# Altium PCB Remie_PCB.PcbDoc (part 1 of 2)
Units mil, origin at the board's own origin, x right, y up, seen from the top; angles counter-clockwise.
Board outline 600 x 1730 mil, 4 copper layers (Top Layer, Int1 (GND), Int2 (PWR), Bottom Layer), stack 61.496 mil thick; 45 components, 27 nets, 169 pads, 72 vias.
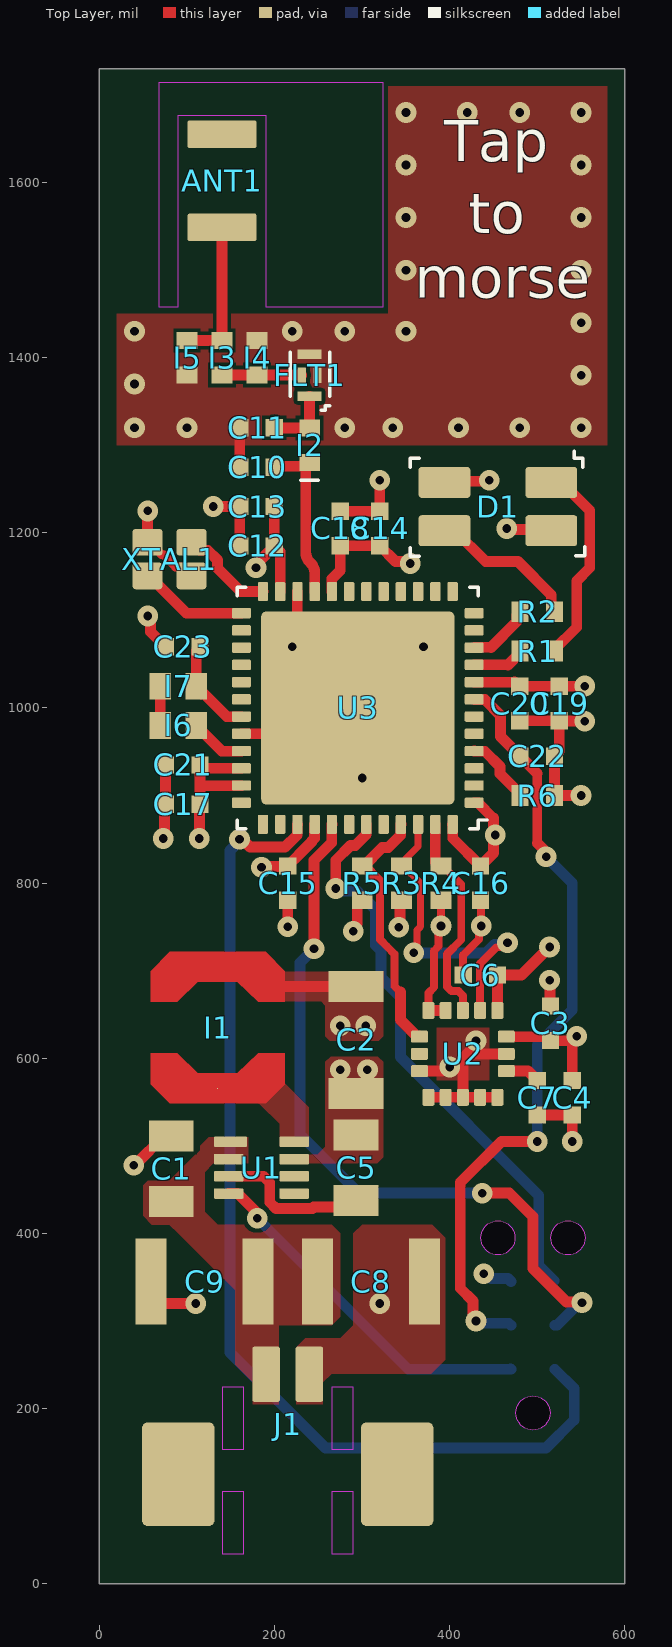
[diagram p0: Top Layer view]
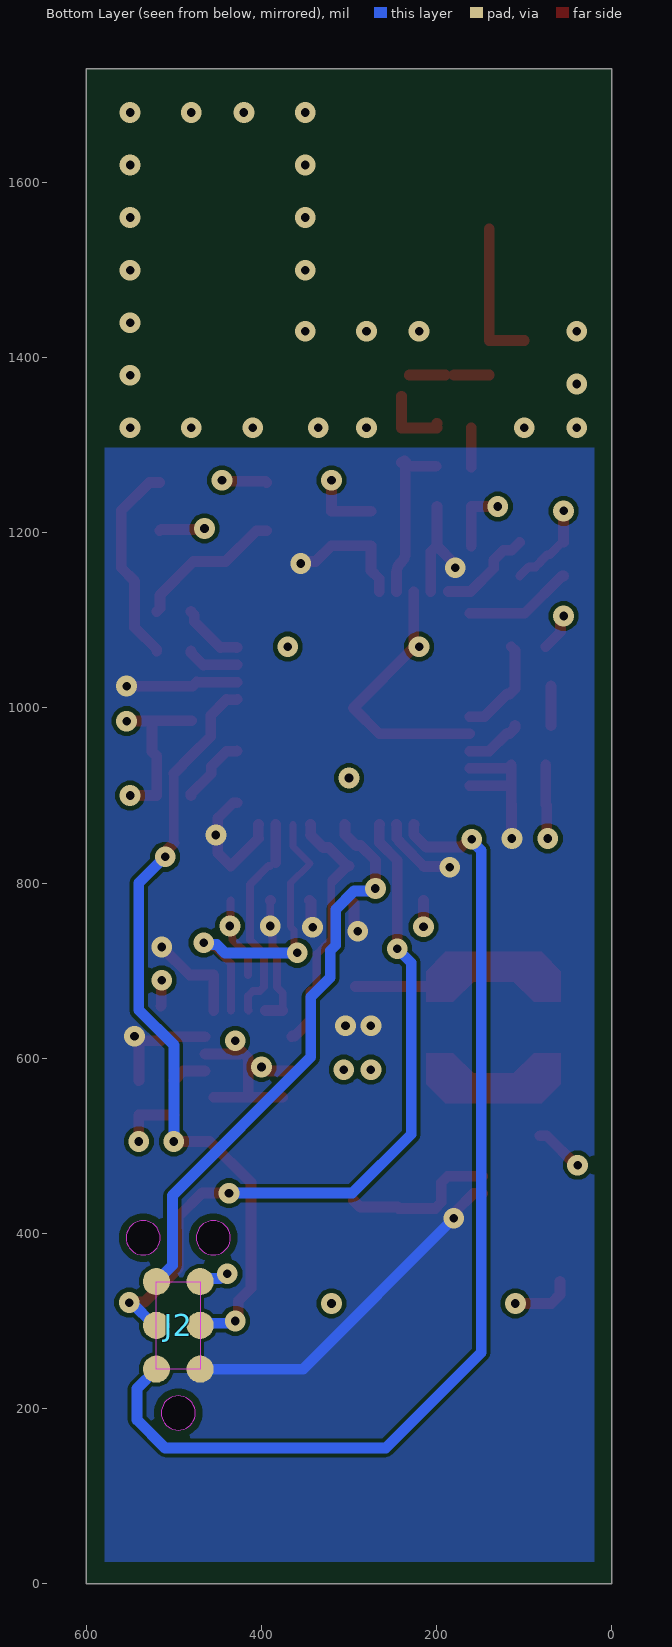
[diagram p1: Bottom Layer view, seen from below]
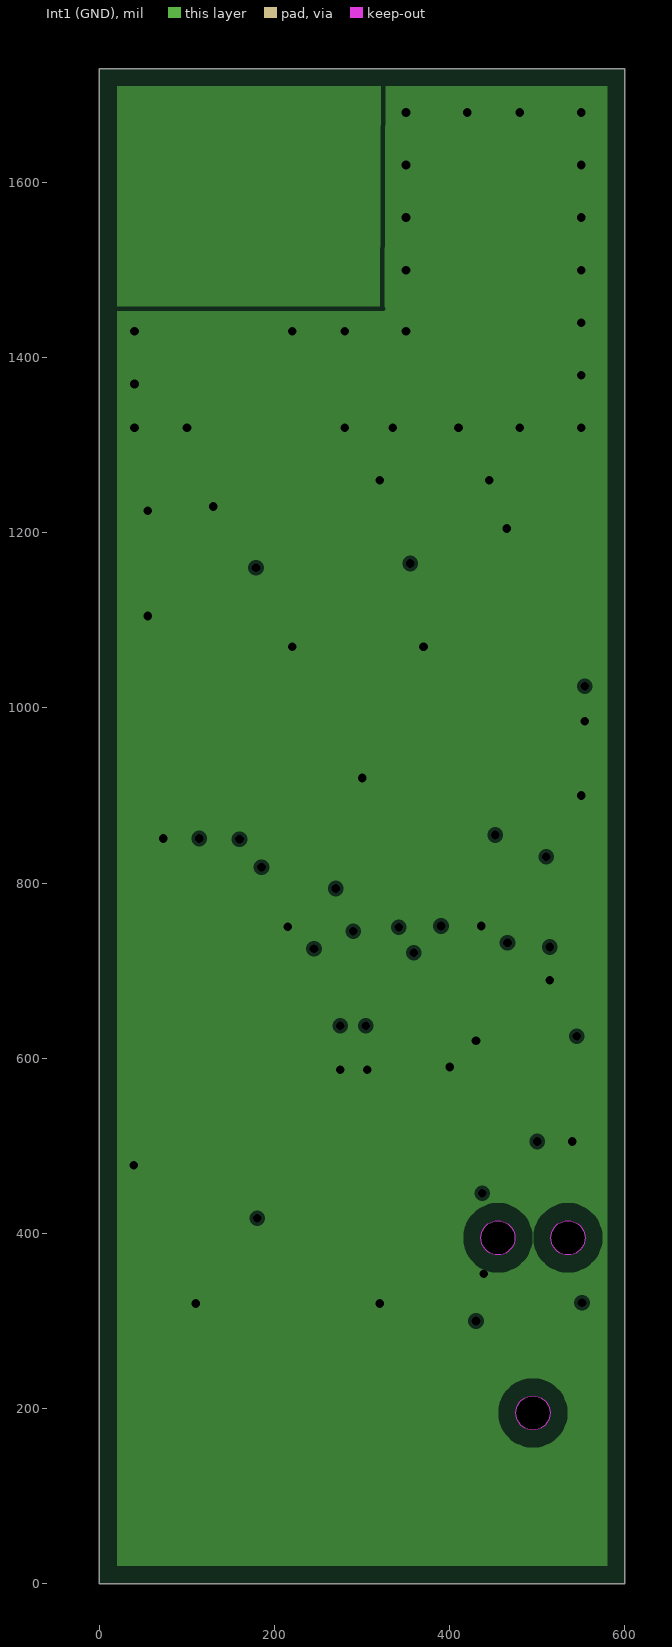
[diagram p2: Int1 (GND), clearances drawn from the general rule]
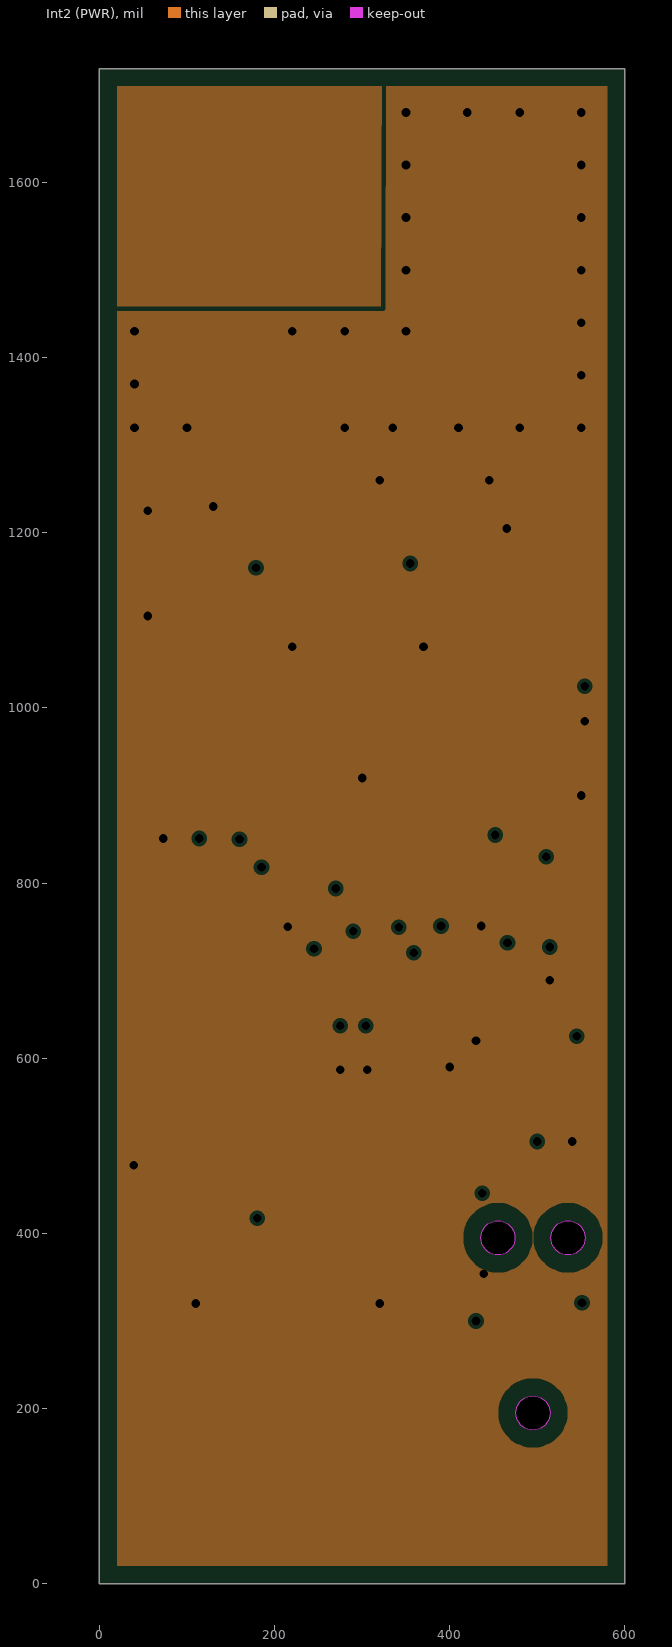
[diagram p3: Int2 (PWR), clearances drawn from the general rule]
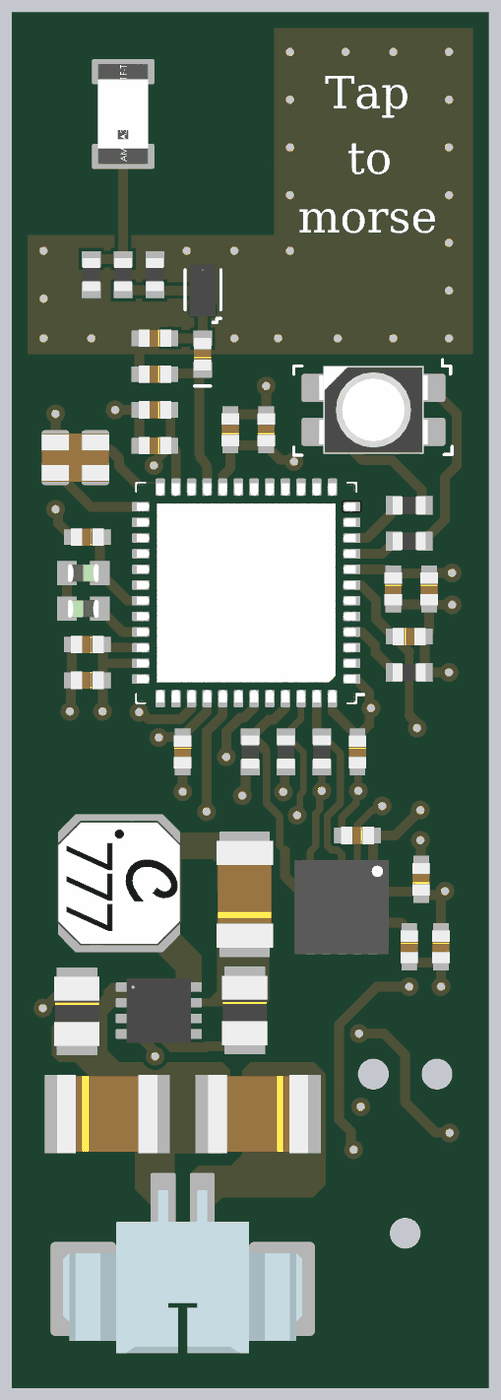
[diagram p4: 3D render of the assembled board from above, using the file's embedded part models]

## Layer stack, top to bottom
Top Solder: solder mask 1, SM-001, Dk 4
Top Layer: signal copper 1.378
Dielectric 1: prepreg 7.7165, PP-022, Dk 4.56
Int1 (GND): plane copper 1.378, net GND
Dielectric 3: core 40.5512, Core-039, Dk 4.6
Int2 (PWR): plane copper 1.378, net GND
Dielectric 5: prepreg 7.7165, PP-022, Dk 4.56
Bottom Layer: signal copper 1.378
Bottom Solder: solder mask 1, SM-001, Dk 4

## Board outline
0,0 600,0 600,1730 0,1730

## Design rules (kind name [scope] priority, off if disabled: settings)
BoardOutlineClearance [All] p1: gap=7.87 ignorepadtopadclearanceinfootprint=FALSE
Clearance [All] p1: gap=4 ignorepadtopadclearanceinfootprint=TRUE except(5: Arc-Via Track-Via SMDPad-Via THPad-Via Via-Via Via-Fill Via-Poly Via-Region Via-Text; 10: Arc-Hole Track-Hole SMDPad-Hole THPad-Hole Via-Hole Fill-Hole Poly-Hole Region-Hole Text-Hole)
ComponentClearance [All] p1: gap=4 collisioncheckmode=3 verticalgap=4 showdistances=TRUE
DiffPairsRouting [All] p1: maxlimit=4 minlimit=4 mostfreqgap=4 toplayer_minwidth=4 toplayer_maxwidth=71497.94 toplayer_prefwidth=4 bottomlayer_minwidth=4 bottomlayer_maxwidth=71497.94 bottomlayer_prefwidth=4 maxuncoupledlength=500
Height [All] p1: minheight=0 maxheight=71497.94 prefheight=500
HoleSize [All] p1: absolutevalues=TRUE maxlimit=248.03 minlimit=7.87 maxpercent=80.000 minpercent=20.000
HoleToHoleClearance [All] p1: gap=10 allowstackedmicrovias=FALSE
MinimumAnnularRing [All] p1: minimumring=6
MinimumSolderMaskSliver [All] p1: minsoldermaskwidth=4
PlaneClearance [All] p1: clearance=4
PlaneConnect PlaneConnectPowerPads [InPadClass('PowerPads')] p1: planeconnectstyle=Direct reliefexpansion=20 reliefentries=4 reliefconductorwidth=10 reliefairgap=10
PlaneConnect [All] p2: pad.planeconnectstyle=Relief pad.reliefexpansion=11.81 pad.reliefentries=4 pad.reliefconductorwidth=4 pad.reliefairgap=4 via.planeconnectstyle=Direct via.reliefexpansion=11.81 via.reliefentries=4 via.reliefconductorwidth=5 via.reliefairgap=5
PolygonConnect [All] p1: thpad.connectstyle=Relief thpad.reliefconductorwidth=4 thpad.reliefentries=4 thpad.polygonreliefangle="90 Angle" thpad.airgapwidth=4 smdpad.connectstyle=Direct smdpad.reliefconductorwidth=4 smdpad.reliefentries=4 smdpad.polygonreliefangle="90 Angle" smdpad.airgapwidth=4 via.connectstyle=Direct via.reliefconductorwidth=5 via.reliefentries=4 via.polygonreliefangle="90 Angle" via.airgapwidth=5
RoutingVias [All] p1: holewidth=7.87 width=17.72 viastyle="Through Hole" minholewidth=7.87 minwidth=17.72 maxholewidth=248.03 maxwidth=257.87
SilkToSilkClearance [All] p1: silktosilkclearance=5
SilkToSolderMaskClearance [IsPad] p1: minsilkscreentomaskgap=5 clearancetoexposedcopper=TRUE
SolderMaskExpansion [All] p1: expansion=0 istentingtop=FALSE
SupplyNets "Schematic Supply Nets_2" [InNet('VCC')] p1: voltage=0.000
SupplyNets "Schematic Supply Nets_1" [InNet('GND')] p2: voltage=0.000
SupplyNets "Schematic Supply Nets" [InNet('+3V3')] p3: voltage=0.000
UnRoutedNet [All] p1: checkbadconnections=TRUE
Width [All] p1: maxlimit=1000 minlimit=4 preferedwidth=12.3 minimp=50.000000 maximp=50.000000 favimp=50.000000
19 further rules are at their usual default settings.

## Components (designator, comment, footprint, x,y, rotation, side; value= is the part's Value field where it differs from the comment)
ANT1 "ANT AMCA31-2R450G-S1F-T3" "ABRACON AMCA31" 140,1602 r180 top
C1 "1uF 16V" C0805 82,474 r270 top value=1uF
C2 "12066C106KAT2A" C1206 293,621 r90 top
C3 "C 0.1u 0402" C0402 515,640 r270 top value=100nF
C4 "C 2.2uF 0402 10V X7R" C0402 540,555 r90 top value=2.2uF
C5 "1uF 16V" C0805 293,475 r270 top value=1uF
C6 "C 10nF 0402" C0402 435,695 r0 top value=10nF
C7 "C 470nF 0402 16V X7R" C0402 500,555 r90 top value=470nF
C8 "C1210C226K9RACTU" C1210 310,345 r180 top
C9 "C1210C226K9RACTU" C1210 120,345 r0 top
C10 "C 0.8 pF 0402 50V C0G" C0402 180,1275 r0 top value=0.8pF
C11 "C 0.3 pF 0402 50V C0G" C0402 180,1320 r0 top
C12 "C 1uF 0402" C0402 180,1185 r0 top
C13 "C 4.7uF 0402 16V" C0402 180,1230 r0 top value=4.7uF
C14 "C 4.7uF 0402 16V" C0402 320,1205 r270 top value=4.7uF
C15 "C 0.1u 0402" C0402 215,800 r90 top value=100nF
C16 "C 0.1u 0402" C0402 435,800 r90 top value=100nF
C17 "C 0.1u 0402" C0402 95,890 r0 top value=100nF
C18 "C 0.1u 0402" C0402 275,1205 r270 top value=100nF
C19 "C 1uF 0402" C0402 525,1005 r90 top
C20 "C 10nF 0402" C0402 480,1005 r90 top value=10nF
C21 "C 4.7uF 0402 16V" C0402 95,935 r0 top value=4.7uF
C22 "C 0.1u 0402 J" C0402 500,945 r180 top
C23 "C 4.7uF 0402 16V" C0402 95,1070 r0 top value=4.7uF
D1 "D BI LED WURTH 150141SV73110" "Wurth 150141SV73110" 455,1230 r180 top
FLT1 "FLT DLF162500LT-5028A1" "TDK DLF Series" 240,1380 r90 top
I1 "I 33uH LPS4018-333MRC" "COILCRAFT LPS4018" 135,635 r90 top value=33uH
I2 "I 2.7nH 0402" "I0402 POL" 240,1300 r90 top value=2.7nH
I3 "I 8.3nH 2% RF 0402" R0402 140,1400 r90 top
I4 "I 9.7nH 5% RF 0402" R0402 180,1400 r270 top
I5 "I 9.7nH 5% RF 0402" R0402 100,1400 r90 top
I6 "I 10 nH Murata" "MURATA LQG15XXX IND" 90,980 r180 top value=10nH
I7 "I 10 nH Murata" "MURATA LQG15XXX IND" 90,1025 r0 top value=10nH
J1 "J MOLEX 2P SMT CONN 53261-0271" "MOLEX 532610271" 215,239.17 r180 top
J2 "Do not place! TAG Connect for STM" TAG-CONNECT-6 495,295 r90 bottom
R1 "R 150 0402" R0402 500,1065 r0 top value=150R
R2 "R 150 0402" R0402 500,1110 r0 top value=150R
R3 "R 5.1K 0402" R0402 345,800 r270 top value=5.1kR
R4 "R 5.1K 0402" R0402 390,800 r270 top value=5.1kR
R5 "R 5.1K 0402" R0402 300,800 r270 top value=5.1kR
R6 "R 10K 0402 1%" R0402 500,900 r180 top value=10kR
U1 "U MAX15462AATA+T" 8TDFN-CU 185,475 r270 top
U2 "U IAM-20680HP" IAM-20680HP 415,605 r270 top
U3 "U STM32WB55CEU6" "STM32WB55xx VFQFPN58" 295,1000 r90 top
XTAL1 "XTAL ABM11W-32.0000MHZ-7-D1X-T3" "ABRACON ABM11W CRYSTALS" 80,1170 r180 top

## Footprints (in the part's own frame and the unit in brackets; to place one, negate y for a bottom-side part, rotate by r counter-clockwise, add the part's x,y. Pads: shape width x height; smd on the part's side, far side on the other; paste and mask are expansions set on the pad)
8TDFN-CU [mm]
  rrect15% 0.3x0.95 smd: 1(-0.75,-0.9)
  rrect15% 0.3x0.85 smd: 2(-0.25,-0.95) 3(0.25,-0.95) 4(0.75,-0.95) 5(0.75,0.95) 6(0.25,0.95) 7(-0.25,0.95) 8(-0.75,0.95)
  body extent -1.03,-1.03 1.03,1.03, height 0.81
"ABRACON ABM11W CRYSTALS" [mm]
  rrect25% 0.875x0.775 smd: 1(-0.637,-0.487) 2(0.637,-0.487) 3(0.637,0.487) 4(-0.637,0.487)
  body extent -1.07,-0.77 1.07,0.77, height 0.5
"ABRACON AMCA31" [mm]
  rrect15% 2x0.8 smd: 1(0,1.35) 2(0,-1.35)
  Top Layer keep-out region: -4.67,3.65 -4.67,-2.85 1.83,-2.85 1.83,3.65 1.822,3.658 1.27,3.658 1.27,-1.905 -1.27,-1.905 -1.27,3.65
  body extent -0.8,-1.6 0.8,1.6, height 1.2
C0402 [mm]
  rect 0.5x0.5 smd: 1(-0.5,0) 2(0.5,0)
  body extent -0.52,-0.28 0.52,0.28, height 0.56
C0805 [mm]
  rect 0.9x1.3 smd: 1(-0.95,0) 2(0.95,0)
  body extent -1.1,-0.72 1.11,0.72, height 0.94
C1206 [mm]
  rect 0.9x1.6 smd: 1(-1.55,0) 2(1.55,0)
  body extent -1.7,-0.9 1.7,0.9, height 1.27
C1210 [mm]
  rect 0.9x2.5 smd: 1(-1.55,0) 2(1.55,0)
  body extent -1.6,-1.25 1.6,1.25, height 1
"COILCRAFT LPS4018" [mil]
  round 1 smd: 1(-69.49,0) 2(69.49,0)
  Top Layer region: 29.53,-76.57 29.53,-46.06 52.36,-22.64 52.36,22.64 29.53,46.06 29.53,76.57 64.57,76.57 86.61,54.92 86.61,-54.92 64.57,-76.57
  Top Layer region: -86.61,-54.92 -64.57,-76.57 -29.53,-76.57 -29.53,-46.06 -52.36,-22.64 -52.36,22.64 -29.53,46.06 -29.53,76.57 -64.57,76.57 -86.61,54.92
  body extent -78,-78 78,78, height 71
"I0402 POL" [mm]
  rect 0.5x0.6 smd: 1(-0.5,0) 2(0.5,0)
  silkscreen extent -1.02,-0.25 -1.02,0.25, body extent -0.52,-0.28 0.52,0.28, height 0.56
IAM-20680HP [mm]
  rrect25% 0.49x0.35 smd: 1(-1.26,1) 2(-1.26,0.5) 3(-1.26,0) 4(-1.26,-0.5) 5(-1.26,-1) 9(1.26,-1) 10(1.26,-0.5) 11(1.26,0) 12(1.26,0.5) 13(1.26,1)
  rrect25% 0.35x0.49 smd: 6(-0.5,-1.26) 7(0,-1.26) 8(0.5,-1.26) 14(0.5,1.26) 15(0,1.26) 16(-0.5,1.26)
  body extent -1.5,-1.5 1.5,1.5, height 0.8
"MOLEX 532610271" [mm]
  rrect15% 0.8x1.6 smd: 1(0.625,0) 2(-0.625,0)
  rrect15% 2.1x3 smd: NC(-3.175,2.9) NC(3.175,2.9)
  Top Layer keep-out region: -1.905,3.407 -1.27,3.407 -1.27,5.207 -1.905,5.207
  Top Layer keep-out region: -1.905,0.381 -1.27,0.381 -1.27,2.181 -1.905,2.181
  Top Layer keep-out region: 1.27,0.381 1.905,0.381 1.905,2.181 1.27,2.181
  Top Layer keep-out region: 1.27,3.407 1.905,3.407 1.905,5.207 1.27,5.207
  body extent -3.83,-0.25 3.83,4.95, height 3.4
"MURATA LQG15XXX IND" [mil]
  rect 24.7x30.41 smd paste+0 mask+0: 1(-20.57,0) 2(20.57,0)
  body extent -20,-12 20,12, height 24
R0402 [mm]
  rect 0.5x0.6 smd: 1(-0.5,0) 2(0.5,0)
  body extent -0.52,-0.28 0.52,0.28, height 0.41
"STM32WB55xx VFQFPN58" [mm]
  rrect25% 0.3x0.55 smd: 1(-2.75,-3.375) 2(-2.25,-3.375) 3(-1.75,-3.375) 4(-1.25,-3.375) 5(-0.75,-3.375) 6(-0.25,-3.375) 7(0.25,-3.375) 8(0.75,-3.375) 9(1.25,-3.375) 10(1.75,-3.375) 11(2.25,-3.375) 25(2.75,3.375) 26(2.25,3.375) 27(1.75,3.375) 28(1.25,3.375) 29(0.75,3.375) 30(0.25,3.375) 31(-0.25,3.375) 32(-0.75,3.375) 33(-1.25,3.375) 34(-1.75,3.375) 35(-2.25,3.375) 36(-2.75,3.375)
  rrect25% 0.3x0.55 smd mask+0.051: 12(2.75,-3.375)
  rrect25% 0.55x0.3 smd: 13(3.375,-2.75) 14(3.375,-2.25) 15(3.375,-1.75) 16(3.375,-1.25) 17(3.375,-0.75) 18(3.375,-0.25) 19(3.375,0.25) 20(3.375,0.75) 21(3.375,1.25) 22(3.375,1.75) 23(3.375,2.25) 24(3.375,2.75) 37(-3.375,2.75) 38(-3.375,2.25) 39(-3.375,1.75) 40(-3.375,1.25) 41(-3.375,0.75) 42(-3.375,0.25) 43(-3.375,-0.25) 44(-3.375,-0.75) 45(-3.375,-1.25) 46(-3.375,-1.75) 47(-3.375,-2.25) 48(-3.375,-2.75)
  rrect5% 5.6x5.6 smd paste-2539.97: 49(0,0)
  silkscreen extent -3.5,-3.75 3.5,3.5, body extent -3.5,-3.5 3.5,3.5, height 0.6
TAG-CONNECT-6 [mil]
  round 30.98 smd paste-39.37: 1(-50,-25) 2(-50,25) 3(0,-25) 4(0,25) 5(50,-25) 6(50,25)
  Top Layer keep-out region: -50,25 50,25 50,-25 -50,-25
  Keep-Out Layer board cut-out: 80.49,-40 81.98,-47.47 86.21,-53.79 92.53,-58.02 100,-59.51 100,-59.51 107.47,-58.02 113.79,-53.79 118.02,-47.47 119.51,-40 119.51,-40 118.02,-32.53 113.79,-26.21 107.47,-21.98 100,-20.49 100,-20.49 92.53,-21.98 86.21,-26.21 81.98,-32.53 80.49,-40
  Keep-Out Layer board cut-out: 80.49,40 81.98,32.53 86.21,26.21 92.53,21.98 100,20.49 100,20.49 107.47,21.98 113.79,26.21 118.02,32.53 119.51,40 119.51,40 118.02,47.47 113.79,53.79 107.47,58.02 100,59.51 100,59.51 92.53,58.02 86.21,53.79 81.98,47.47 80.49,40
  Keep-Out Layer board cut-out: -119.51,0 -118.02,-7.47 -113.79,-13.79 -107.47,-18.02 -100,-19.51 -100,-19.51 -92.53,-18.02 -86.21,-13.79 -81.98,-7.47 -80.49,0 -80.49,0 -81.98,7.47 -86.21,13.79 -92.53,18.02 -100,19.51 -100,19.51 -107.47,18.02 -113.79,13.79 -118.02,7.47 -119.51,0
"TDK DLF Series" [mm]
  rrect5% 0.275x0.7 smd: 1(-0.613,0) 3(0.613,0)
  rrect5% 0.45x0.245 smd: 2(0,-0.228) 4(0,0.228)
  silkscreen extent -1.02,-0.58 0.66,0.56, body extent -0.83,-0.42 0.83,0.42, height 0.26
"Wurth 150141SV73110" [mm]
  rrect20% 1.5x0.9 smd: 1(-1.55,-0.7) 2(-1.55,0.7) 3(1.55,-0.7) 4(1.55,0.7)
  silkscreen extent -2.51,-1.6 2.54,1.45, body extent -1.75,-1.4 1.75,1.4, height 1.75

## Part data
ANT1: "Chip Dielectric Antenna; 1dBi; 2450MHz; T/R", Manufacturer=Abracon, Manufacturer Part Number=AMCA31-2R450G-S1F-T3, Supplier Part Number=815-CA312R450GS1FT3, Category="RF Antennas", ComponentLink1Description=https://datasheet.ciiva.com/29647/amca31-2r450g-s1f-t-29647350.pdf?src-supplier=Digikey, ComponentLink1URL=https://datasheet.ciiva.com/29647/amca31-2r450g-s1f-t-29647350.pdf?src-supplier=Digikey, Pricing="1=0,43, 10=0,321, 50=0,321, 100=0,229, 1000=0,148, 10000=0,148 (USD)", RoHS=Yes, Stock=21374, Supplier=Mouser
C1 C5: library part "C 1U 0805 X7R 16V", "Multilayer Ceramic Capacitor, 1 uF, 16 V, ± 10%, X7R, 0805 [2012 Metric]", Capacitance=1uF, Case Code (Imperial)=0805, Case Code (Metric)=2012, Dielectric=X7R, Dielectric Material=Ceramic, Manufacturer=KEMET, Manufacturer Part Number=C0805C105K4RACTU, Max Operating Temperature=125°C, Min Operating Temperature=-55°C, Package Quantity=1, Supplier Part Number=80-C0805C105K4R, Supplier Part Number 1=4515770, Tolerance=10%, Voltage=16V, Case/Package=0805, Category="Ceramic Capacitors", ComponentLink1Description=https://datasheet.ciiva.com/6074/1722731-6074364.pdf?src-supplier=Farnell, ComponentLink1URL=https://datasheet.ciiva.com/6074/1722731-6074364.pdf?src-supplier=Farnell, ComponentLink2Description=https://datasheet.ciiva.com/28692/1851736-28692942.pdf?src-supplier=Element14, ComponentLink2URL=https://datasheet.ciiva.com/28692/1851736-28692942.pdf?src-supplier=Element14, ComponentLink3Description=https://datasheet.ciiva.com/14585/70095383-14585511.pdf?src-supplier=Allied+Electronics, ComponentLink3URL=https://datasheet.ciiva.com/14585/70095383-14585511.pdf?src-supplier=Allied+Electronics, ComponentLink4Description=https://datasheet.ciiva.com/14603/70095383-14603388.pdf?src-supplier=Allied+Electronics, ComponentLink4URL=https://datasheet.ciiva.com/14603/70095383-14603388.pdf?src-supplier=Allied+Electronics, ComponentLink5Description=https://datasheet.ciiva.com/45846/docfinderpartnumberc0402c102k5ractu-45846934.pdf?src-supplier=Onlinecomponents.com, ComponentLink5URL=https://datasheet.ciiva.com/45846/docfinderpartnumberc0402c102k5ractu-45846934.pdf?src-supplier=Onlinecomponents.com, ComponentLink6Description=https://datasheet.ciiva.com/18193/getdatasheetpartid-331279-18193467.pdf?src-supplier=Verical, ComponentLink6URL=https://datasheet.ciiva.com/18193/getdatasheetpartid-331279-18193467.pdf?src-supplier=Verical, ComponentLink7Description=https://datasheet.ciiva.com/39122/docfinderpartnumberc0402c102k5ractu-39122926.pdf?src-supplier=Onlinecomponents.com, ComponentLink7URL=https://datasheet.ciiva.com/39122/docfinderpartnumberc0402c102k5ractu-39122926.pdf?src-supplier=Onlinecomponents.com, Construction=Flat, Contact Plating=Tin,Matte, Depth=1.25mm, Dissipation Factor=5%, Height=0.9mm, Lead Free=5697LeadFree, Lead Pitch=0.75mm, Length=2mm, Material=4241ConductorMaterial, Mount="Surface Mount,PCB", Mounting Technology="Surface Mount,PCB", Number of Pins=2, Packaging="Tape and Reel", Pins=2, Pricing="1=0,1, 10=0,07, 50=0,07, 100=0,041, 1000=0,026, 10000=0,019 (USD)", Pricing 1="25=0,06100 (USD)", Radiation Hardening=No, REACH SVHC="No SVHC", Reach SVHC Compliant=No, RoHS=Yes, RoHS Compliant=Yes, Series=C, Stock=415305, Stock 1=10300, Supplier=Mouser, Supplier 1=RSComponents, Termination=SMD/SMT, Thickness=0.039inch, Voltage Rating=16V, Voltage Rating (AC)=16V, Voltage Rating (DC)=16V, Width=0.049inch
C2: library part "C 10uF 1206 6.3V X7R", "1206 6.3 V 10 uF ±10% Tolerance X7R SMT Multilayer Ceramic Capacitor", Capacitance=10uF, Case Code (Imperial)=1206, Case Code (Metric)=3216, Dielectric=X7R, Manufacturer="Kyocera AVX", Max Operating Temperature=125°C, Min Operating Temperature=-55°C, Package Quantity=2500, Supplier Part Number=478-KGM31HR70J106KUCT-ND, Supplier Part Number 1=581-12066C106KAT2A, Tolerance=10%, Voltage Rating=6.3V, Case/Package=1206, Category="Ceramic Capacitors", ComponentLink1Description=https://datasheet.ciiva.com/6265/cx7r-6265898.pdf?src-supplier=Digi-Key, ComponentLink1URL=https://datasheet.ciiva.com/6265/cx7r-6265898.pdf?src-supplier=Digi-Key, ComponentLink2Description=https://datasheet.ciiva.com/5427/cx7r-218113-5427819.pdf?src-supplier=Mouser, ComponentLink2URL=https://datasheet.ciiva.com/5427/cx7r-218113-5427819.pdf?src-supplier=Mouser, ComponentLink3Description=https://datasheet.ciiva.com/6265/cx7r-6265898.pdf?src-supplier=Digikey, ComponentLink3URL=https://datasheet.ciiva.com/6265/cx7r-6265898.pdf?src-supplier=Digikey, Depth=1.6mm, Height=1.78mm, Lead Free="Lead Free", Length=3.2mm, Manufacturer Part Number=12066C106KAT2A, Mount="Surface Mount", Number of Pins=2, Packaging="Tape and Reel", Pricing="1=1,1, 10=0,822, 50=0,7498, 100=0,6143, 500=0,49028, 1000=0,4326 (USD)", Pricing 1="1=0,45000, 10=0,42000, 50=0,42000, 100=0,42000, 1000=0,42000, 10000=0,35600 (USD)", Radiation Hardening=No, RoHS=Yes, Stock=43567, Stock 1=4630, Supplier=Digikey, Supplier 1=Mouser, Termination=SMD/SMT, Thickness=0.037inch, Voltage Rating (DC)=6.3V, Width=0.063inch
C3 C15 C16 C17 C18: "Multilayer Ceramic Capacitor, 0.1 uF, 50 V, ± 10%, X7R, 0402 [1005 Metric]", Case/Package=343Case, JLCPCB=C307331, Manufacturer=Samsung, Manufacturer Part Number=CL05B104KB54PNC, Max Operating Temperature=125°C, Min Operating Temperature=-55°C, Supplier Part Number=1276-CL05B104KB54PNCCT-ND, Tolerance=10%, Voltage Rating=50V, Category="Ceramic Capacitors", ComponentLink1Description=https://datasheet.octopart.com/CL05B104KB54PNC-Samsung-datasheet-8326407.pdf?src-supplier=TME, ComponentLink1URL=https://datasheet.octopart.com/CL05B104KB54PNC-Samsung-datasheet-8326407.pdf?src-supplier=TME, Height=550um, Material=4241ConductorMaterial, Pricing="1=0,1, 10=0,044, 50=0,025, 100=0,0194, 500=0,0146, 1000=0,01147, 2500=0,01043, 5000=0,00959 (USD)", Pricing 1="1=0,10000, 10=0,04600, 50=0,02500, 100=0,02040, 500=0,01460, 1000=0,01147, 2500=0,01043, 5000=0,00959 (USD)", RoHS=Yes, RoHS Compliant=Yes, Stock=765476, Stock 1=3863336, Supplier=Digikey, Supplier 1=Digi-Key, Supplier Part Number 1=1276-CL05B104KB54PNCCT-ND
C4: "Multilayer Ceramic Capacitor, 2.2 uF, 10 V, ± 10%, X7R, 0402 [1005 Metric] CC0402KRX5R7BB225", Case Code (Imperial)=0402, Case Code (Metric)=1005, Dielectric=X5R, Manufacturer=Yageo, Manufacturer Part Number=CC0402KRX5R7BB225, Max Operating Temperature=85°C, Min Operating Temperature=-55°C, Package Quantity=5000, Supplier Part Number=603-CC402KRX5R7BB225, Temperature Coefficient=30ppm/°C, Tolerance=10%, Voltage Rating=16V, Case/Package=0402, Category="Ceramic Capacitors", ComponentLink1Description=http://www.mouser.com/ds/2/447/Yageo_UPY-GP_NP0_16V-to-50V_9-358835.pdf?src-supplier=Mouser, ComponentLink1URL=http://www.mouser.com/ds/2/447/Yageo_UPY-GP_NP0_16V-to-50V_9-358835.pdf?src-supplier=Mouser, ComponentLink2Description=http://www.yageo.com/documents/recent/UPY-GPHC_X5R_4V-to-50V_25.pdf?src-supplier=Digikey, ComponentLink2URL=http://www.yageo.com/documents/recent/UPY-GPHC_X5R_4V-to-50V_25.pdf?src-supplier=Digikey, ComponentLink3Description=https://www.yageo.com/upload/media/product/productsearch/datasheet/mlcc/UPY-GPHC_X5R_4V-to-50V_25.pdf?src-supplier=Digikey, ComponentLink3URL=https://www.yageo.com/upload/media/product/productsearch/datasheet/mlcc/UPY-GPHC_X5R_4V-to-50V_25.pdf?src-supplier=Digikey, ComponentLink4Description=https://datasheet.octopart.com/CC0402KRX5R7BB225-Yageo-datasheet-158238148.pdf?src-supplier=Farnell, ComponentLink4URL=https://datasheet.octopart.com/CC0402KRX5R7BB225-Yageo-datasheet-158238148.pdf?src-supplier=Farnell, ComponentLink5Description=https://datasheet.octopart.com/CC0402KRX5R7BB225-Yageo-datasheet-158238148.pdf?src-supplier=Newark, ComponentLink5URL=https://datasheet.octopart.com/CC0402KRX5R7BB225-Yageo-datasheet-158238148.pdf?src-supplier=Newark, ComponentLink6Description=https://datasheet.octopart.com/CC0402KRX5R7BB225-Yageo-datasheet-137700082.pdf?src-supplier=Future+Electronics, ComponentLink6URL=https://datasheet.octopart.com/CC0402KRX5R7BB225-Yageo-datasheet-137700082.pdf?src-supplier=Future+Electronics, Halogen Free="Halogen Free", Height=0.5mm, Lead Free="Lead Free", Length=1mm, Material=4241ConductorMaterial, Mounting Technology="Surface Mount", Packaging="Tape and Reel", Pricing="1=0,17, 10=0,067, 50=0,067, 100=0,039, 1000=0,03, 10000=0,023 (USD)", RoHS=Yes, RoHS Compliant=Yes, Series=CC, Stock=83882, Supplier=Mouser, Termination=SMD/SMT, Voltage Rating (DC)=16V, Weight=2.3E-05oz, Width=0.5mm
C6 C20: "Multilayer Ceramic Capacitor, 0.01 uF, 50 V, ± 10%, X7R, 0402 [1005 Metric]", Capacitance=10nF, Case Code (Imperial)=0402, Case Code (Metric)=1005, Dielectric=X7R, JLCPCB=C15195, Manufacturer=Samsung, Manufacturer Part Number=CL05B103KB5NNNC, Max Operating Temperature=125°C, Min Operating Temperature=-55°C, Package Quantity=1, Supplier Part Number=187-CL05B103KB5NNNC, Tolerance=10%, Voltage=50V, Case/Package=0402, Category="Ceramic Capacitors", ComponentLink1Description=https://datasheet.ciiva.com/15195/getdatasheetpartid-359682-15195636.pdf?src-supplier=Verical, ComponentLink1URL=https://datasheet.ciiva.com/15195/getdatasheetpartid-359682-15195636.pdf?src-supplier=Verical, ComponentLink2Description=https://datasheet.ciiva.com/29198/458761-da-01-en-vs-kondensator-0402-29198432.pdf?src-supplier=Conrad, ComponentLink2URL=https://datasheet.ciiva.com/29198/458761-da-01-en-vs-kondensator-0402-29198432.pdf?src-supplier=Conrad, ComponentLink3Description=https://datasheet.ciiva.com/26309/mlcc-catalogdownload2013-eng-26309005.pdf?src-supplier=Distrelec, ComponentLink3URL=https://datasheet.ciiva.com/26309/mlcc-catalogdownload2013-eng-26309005.pdf?src-supplier=Distrelec, Construction=Flat, Contact Plating=Tin, Depth=0.5mm, Height=0.5mm, Lead Free="Lead Free", Length=1mm, Material=Ceramic, Mount="Surface Mount", Mounting Technology="Surface Mount", Packaging="Tape and Reel", Pricing="1=0,1, 10=0,007, 50=0,007, 100=0,005, 1000=0,003, 10000=0,002 (USD)", Pricing 1="10000=0,00290, 20000=0,00230, 50000=0,00210, 100000=0,00190 (USD)", Pricing 2="1=0,10000, 10=0,01500, 50=0,00820, 100=0,00670, 500=0,00478, 1000=0,00375, 2500=0,00341, 5000=0,00314 (USD)", Pricing 3="1=0,10000, 10=0,00900, 50=0,00900, 100=0,00700, 500=0,00600, 1000=0,00500, 2500=0,00400, 10000=0,00300, 20000=0,00200 (USD)", Radiation Hardening=No, RoHS=Yes, RoHS Compliant=Yes, Series=CL, Stock=525397, Stock 1=6530000, Stock 2=14692768, Stock 3=2909879, Supplier=Mouser, Supplier 1="Arrow Electronics", Supplier 2=Digi-Key, Supplier 3=Mouser, Supplier Part Number 1=CL05B103KB5NNNC, Supplier Part Number 2=1276-1028-1-ND, Supplier Part Number 3=187-CL05B103KB5NNNC, Thickness=0.022inch, Voltage Rating=50V, Voltage Rating (DC)=50V, Width=0.02inch
C7: "Multilayer Ceramic Capacitor, 0.47 uF, 16 V, ± 10%, X7R, 0402 [1005 Metric] CC0402KRX7R5BB474", Case/Package=343Case, Dielectric=1511DielectricType, Manufacturer=Yageo, Manufacturer Part Number=CC0402KRX7R5BB474, Max Operating Temperature=125°C, Min Operating Temperature=-55°C, Supplier Part Number=13-CC0402KRX7R5BB474CT-ND, Temperature Coefficient=30ppm/°C, Voltage Rating=6.3V, Category="Ceramic Capacitors", ComponentLink1Description=https://datasheet.octopart.com/CC0402KRX7R5BB474-Yageo-datasheet-78855684.pdf?src-supplier=Upverter, ComponentLink1URL=https://datasheet.octopart.com/CC0402KRX7R5BB474-Yageo-datasheet-78855684.pdf?src-supplier=Upverter, ComponentLink2Description=https://datasheet.octopart.com/CC0402KRX7R5BB474-Yageo-datasheet-166511530.pdf?src-supplier=Future+Electronics, ComponentLink2URL=https://datasheet.octopart.com/CC0402KRX7R5BB474-Yageo-datasheet-166511530.pdf?src-supplier=Future+Electronics, ComponentLink3Description=https://datasheet.octopart.com/CC0402KRX7R5BB474-Yageo-datasheet-165992755.pdf?src-supplier=Future+Electronics, ComponentLink3URL=https://datasheet.octopart.com/CC0402KRX7R5BB474-Yageo-datasheet-165992755.pdf?src-supplier=Future+Electronics, ComponentLink4Description=https://datasheet.octopart.com/CC0402KRX7R5BB474-Yageo-datasheet-10883670.pdf, ComponentLink4URL=https://datasheet.octopart.com/CC0402KRX7R5BB474-Yageo-datasheet-10883670.pdf, Halogen Free=5694HalogenFree, Height=550um, Lead Free=5697LeadFree, Material=4241ConductorMaterial, Pricing="1=0,27, 10=0,178, 50=0,1122, 100=0,0897, 500=0,0648, 1000=0,05733, 2500=0,05484, 5000=0,04985 (USD)", RoHS Compliant=Yes, Stock=60692, Supplier=Digikey, Voltage Rating (DC)=6.3V
C8 C9: library part "C 22uF 1210 X7R 6.3V", "Cap Ceramic 22uF 6.3V X7R 10% SMD 1210 125C Plastic T/R", Capacitance=22uF, Case Code (Imperial)=1210, Case Code (Metric)=3225, Dielectric=X7R, Dielectric Material=Ceramic, Manufacturer=KEMET, Max Operating Temperature=125°C, Min Operating Temperature=-55°C, Package Quantity=1000, Supplier Part Number 1=80-C1210C226K9R, Tolerance=10%, Voltage Rating=6.3V, Case/Package=1210, Category="Ceramic Capacitors", ComponentLink1Description=https://datasheet.ciiva.com/5413/kem-c1002-x7r-smd-357932-5413704.pdf?src-supplier=Mouser, ComponentLink1URL=https://datasheet.ciiva.com/5413/kem-c1002-x7r-smd-357932-5413704.pdf?src-supplier=Mouser, ComponentLink2Description=https://datasheet.ciiva.com/7807/kem-c1002-x7r-smd-7807532.pdf?src-supplier=Element14, ComponentLink2URL=https://datasheet.ciiva.com/7807/kem-c1002-x7r-smd-7807532.pdf?src-supplier=Element14, ComponentLink3Description=https://datasheet.ciiva.com/28608/1918693-28608766.pdf?src-supplier=Element14, ComponentLink3URL=https://datasheet.ciiva.com/28608/1918693-28608766.pdf?src-supplier=Element14, Construction=Flat, Depth=2.5mm, Height=2.5mm, Length=3.2mm, Manufacturer Part Number=C1210C226K9RACTU, Mount="Surface Mount", Packaging="Tape and Reel", Pricing 1="1=0,88000, 10=0,55700, 50=0,55700, 100=0,48000, 1000=0,36300, 10000=0,36300 (USD)", Radiation Hardening=No, REACH SVHC="No SVHC", RoHS=Yes, RoHS Compliant=Yes, Series=C, Stock 1=951, Supplier 1=Mouser, Termination=SMD/SMT, Thickness=0.11inch, Voltage Rating (DC)=6.3V, Width=2.5mm
C10: "Multilayer Ceramic Capacitor, 0.8 pF, 50 V, ± 0.1pF, C0G (NP0), 0402 [1005 Metric] GRM1555C1HR80BA01D", Case Code (Imperial)=0402, Case Code (Metric)=1005, Dielectric=C0G, Manufacturer=Murata, Manufacturer Part Number=GRM1555C1HR80BA01D, Max Operating Temperature=125°C, Min Operating Temperature=-55°C, Package Quantity=1, Supplier Part Number=81-GRM1555C1HR80BA1D, Voltage=50V, Case/Package=0402, Category="Ceramic Capacitors", ComponentLink1Description=https://datasheet.ciiva.com/6263/grm1555c1hr75ba01-01-6263972.pdf?src-supplier=Digikey, ComponentLink1URL=https://datasheet.ciiva.com/6263/grm1555c1hr75ba01-01-6263972.pdf?src-supplier=Digikey, ComponentLink2Description=https://datasheet.ciiva.com/5436/product-5436190.pdf?src-supplier=Mouser, ComponentLink2URL=https://datasheet.ciiva.com/5436/product-5436190.pdf?src-supplier=Mouser, ComponentLink3Description=https://datasheet.ciiva.com/11616/product-11616827.pdf?src-supplier=Avnet, ComponentLink3URL=https://datasheet.ciiva.com/11616/product-11616827.pdf?src-supplier=Avnet, ComponentLink4Description=https://datasheet.ciiva.com/6263/partnumbering-e-01-6263975.pdf?src-supplier=Digikey, ComponentLink4URL=https://datasheet.ciiva.com/6263/partnumbering-e-01-6263975.pdf?src-supplier=Digikey, ComponentLink5Description=https://datasheet.ciiva.com/6263/partnumbering-e-01-6263977.pdf?src-supplier=Digikey, ComponentLink5URL=https://datasheet.ciiva.com/6263/partnumbering-e-01-6263977.pdf?src-supplier=Digikey, Construction=Flat, Depth=0.5mm, Height=0.5mm, Lead Free="Lead Free", Length=1mm, Material=Ceramic, Mounting Technology="Surface Mount", Packaging="Tape and Reel", Pricing="1=0,1, 10=0,04, 50=0,04, 100=0,023, 1000=0,018, 10000=0,015 (USD)", Radiation Hardening=No, RoHS=Yes, RoHS Compliant=Yes, Series=GRM, Stock=38144, Supplier=Mouser, Termination=SMD/SMT, Thickness=0.022inch, Voltage Rating=50V, Voltage Rating (DC)=50V, Width=0.5mm
C11: "Cap Ceramic 0.3pF 50V C0G 0.05pF Pad SMD 0402 125°C T/R", Manufacturer=Murata, Manufacturer Part Number=GRM1555C1HR30WA01D, Supplier Part Number=81-GRM1555C1HR30WA1D, Category="Ceramic Capacitors", ComponentLink1Description=https://datasheet.ciiva.com/6264/grm1555c1hr30ba01-01-6264100.pdf?src-supplier=Digikey, ComponentLink1URL=https://datasheet.ciiva.com/6264/grm1555c1hr30ba01-01-6264100.pdf?src-supplier=Digikey, ComponentLink2Description=https://datasheet.ciiva.com/11617/product-11617602.pdf?src-supplier=Avnet, ComponentLink2URL=https://datasheet.ciiva.com/11617/product-11617602.pdf?src-supplier=Avnet, ComponentLink3Description=https://datasheet.ciiva.com/6264/partnumbering-e-01-6264101.pdf?src-supplier=Digikey, ComponentLink3URL=https://datasheet.ciiva.com/6264/partnumbering-e-01-6264101.pdf?src-supplier=Digikey, ComponentLink4Description=https://datasheet.ciiva.com/6264/partnumbering-e-01-6264102.pdf?src-supplier=Digikey, ComponentLink4URL=https://datasheet.ciiva.com/6264/partnumbering-e-01-6264102.pdf?src-supplier=Digikey, Pricing="1=0,17, 10=0,065, 50=0,065, 100=0,038, 1000=0,033, 10000=0,028 (USD)", RoHS=Yes, Stock=16234, Supplier=Mouser
C12 C19: "Multilayer Ceramic Capacitor, 1 uF, 10 V, ± 10%, X5R, 0402 [1005 Metric]", Capacitance=1uF, Case Code (Imperial)=0402, Case Code (Metric)=1005, Dielectric=X5R, JLCPCB=C14445, Manufacturer=Samsung, Manufacturer Part Number=CL05A105KP5NNNC, Max Operating Temperature=85°C, Min Operating Temperature=-55°C, Package Quantity=1, Supplier Part Number=187-CL05A105KP5NNNC, Tolerance=10%, Voltage Rating=10V, Case/Package=0402, Category="Ceramic Capacitors", ComponentLink1Description=http://www.farnell.com/datasheets/2710650.pdf?src-supplier=Farnell, ComponentLink1URL=http://www.farnell.com/datasheets/2710650.pdf?src-supplier=Farnell, ComponentLink2Description=http://www.samsungsem.com/kr/support/product-search/mlcc/CL05A105KP5NNNC.jsp?src-supplier=Digi-Key, ComponentLink2URL=http://www.samsungsem.com/kr/support/product-search/mlcc/CL05A105KP5NNNC.jsp?src-supplier=Digi-Key, ComponentLink3Description=http://www.farnell.com/datasheets/2710650.pdf?src-supplier=Element14, ComponentLink3URL=http://www.farnell.com/datasheets/2710650.pdf?src-supplier=Element14, ComponentLink4Description=https://datasheet.ciiva.com/15195/getdatasheetpartid-358390-15195630.pdf?src-supplier=Verical, ComponentLink4URL=https://datasheet.ciiva.com/15195/getdatasheetpartid-358390-15195630.pdf?src-supplier=Verical, ComponentLink5Description=https://datasheet.ciiva.com/29198/459159-da-01-en-vs-kondensator-0402-29198341.pdf?src-supplier=Conrad, ComponentLink5URL=https://datasheet.ciiva.com/29198/459159-da-01-en-vs-kondensator-0402-29198341.pdf?src-supplier=Conrad, Contact Plating=Tin, Depth=0.5mm, Height=0.5mm, Length=1mm, Material=Ceramic, Mount="Surface Mount", Packaging="Tape and Reel", Pricing="1=0,1, 10=0,02, 50=0,02, 100=0,012, 1000=0,009, 10000=0,006 (USD)", Pricing 1="1=0,06300, 10=0,04210, 25=0,03040, 100=0,01620, 500=0,01020 (USD)", Pricing 2="1=0,10000, 10=0,03600, 50=0,01960, 100=0,01610, 500=0,01148, 1000=0,00903, 2500=0,00821, 5000=0,00755 (USD)", Pricing 3="1=0,10000, 10=0,02200, 50=0,02200, 100=0,01700, 500=0,01300, 1000=0,01000, 2500=0,00900, 10000=0,00600, 50000=0,00500 (USD)", Radiation Hardening=No, RoHS=Yes, RoHS Compliant=Yes, Series=CL, Stock=1490982, Stock 1=131, Stock 2=6411089, Stock 3=1468368, Supplier=Mouser, Supplier 1="Arrow Electronics", Supplier 2=Digi-Key, Supplier 3=Mouser, Supplier Part Number 1=CL05A105KP5NNNC, Supplier Part Number 2=1276-1076-1-ND, Supplier Part Number 3=187-CL05A105KP5NNNC, Thickness=0.022inch, Voltage Rating (DC)=10V, Width=0.02inch
C13 C14 C21 C23: "Multilayer Ceramic Capacitor, 4.7 uF, 16 V, ± 20%, X5R, 0402 [1005 Metric] CL05A475MO5NUNC", Case Code (Imperial)=0402, Case Code (Metric)=1005, Manufacturer=Samsung, Manufacturer Part Number=CL05A475MO5NUNC, Max Operating Temperature=85°C, Min Operating Temperature=-55°C, Supplier Part Number=82AC9197, Tolerance=20%, Voltage Rating=16V, Case/Package=0402, Category="Ceramic Capacitors", Height=550um, Length=0.039inch, Material=4241ConductorMaterial, Mounting Technology="Surface Mount", Packaging="Cut Tape", Pricing="1=0,458, 25=0,305, 100=0,182, 250=0,163, 500=0,144 (USD)", RoHS=Yes, RoHS Compliant=Yes, Series=CL, Stock=26909, Supplier=Avnet, Thickness=0.022inch, Voltage Rating (DC)=16V, Width=0.02inch
C22: "Cap Ceramic 0.1uF 50V X7R 10% Pad SMD 0402 125C Low ESR Automotive CL05B104KB54PNC", JLCPCB=C307331, Manufacturer=Samsung, Manufacturer Part Number=CL05B104KB54PNC, Supplier Part Number 1=1276-CL05B104KB54PNCCT-ND, Category="Ceramic Capacitors", Pricing 1="1=0,10000, 10=0,04600, 50=0,02500, 100=0,02040, 500=0,01460, 1000=0,01147, 2500=0,01043, 5000=0,00959 (USD)", RoHS=Yes, RoHS Compliant=Yes, Stock 1=3863336, Supplier 1=Digi-Key
D1: "WL-SBTW SMT bi-color TOP LED waterclear", Manufacturer="Wurth Electronics", Manufacturer Part Number=150141SV73110, Supplier Part Number=732-13404-1-ND, Category=LEDs, ComponentLink1Description=Datasheet, ComponentLink1URL=https://www.we-online.com/catalog/datasheet/150141SV73110.pdf, Pricing="1=0,74, 10=0,64, 50=0,562, 250=0,505, 500=0,451 (USD)", RoHS=No, RoHS Compliant=No, Stock=1012, Supplier=Digikey
FLT1: "FILTER, LOW PASS, 2.4GHz to 2.5GHz; Filter Type: Low Pass; Pass Band Frequency: 2.", Manufacturer=TDK, Manufacturer Part Number=DLF162500LT-5028A1, Supplier Part Number=3650703, ComponentLink1Description=https://datasheet.ciiva.com/24123/dlf162500lt-5028a1-279920-24123794.pdf?src-supplier=Mouser, ComponentLink1URL=https://datasheet.ciiva.com/24123/dlf162500lt-5028a1-279920-24123794.pdf?src-supplier=Mouser, ComponentLink2Description=https://datasheet.ciiva.com/23909/1751212-23909058.pdf?src-supplier=Newark, ComponentLink2URL=https://datasheet.ciiva.com/23909/1751212-23909058.pdf?src-supplier=Newark, ComponentLink3Description=https://datasheet.ciiva.com/30018/rf-lpf-dlf162500lt-5028a1-en-30018074.pdf?src-supplier=Avnet, ComponentLink3URL=https://datasheet.ciiva.com/30018/rf-lpf-dlf162500lt-5028a1-en-30018074.pdf?src-supplier=Avnet, Pricing="10=0,372, 100=0,299, 500=0,243, 1000=0,215, 2000=0,195, 4000=0,174, 20000=0,171, 40000=0,167 (EUR)", RoHS=Yes, Stock=1078, Supplier=Farnell
I1: "Power inductor, shielded, 20/30% tol, SMT, RoHS, lead-free, halogen-free LPS4018-333MRC Isat 0.58A", Case/Package=SMD/SMT, Manufacturer=Coilcraft, Manufacturer Part Number=LPS4018-333MRC, Max DC Current=680mA, Max Operating Temperature=85°C, Min Operating Temperature=-40°C, Package Quantity=1000, Self Resonant Frequency=20MHz, Supplier Part Number=994-LPS4018-333MRC, Test Frequency=100kHz, Tolerance=20%, Category=Inductors, ComponentLink1Description=http://www.mouser.com/ds/2/597/lps4018-270702.pdf?src-supplier=Mouser, ComponentLink1URL=http://www.mouser.com/ds/2/597/lps4018-270702.pdf?src-supplier=Mouser, Core Material=Ferrite, Height=1.7mm, Length=4mm, Packaging="Tape and Reel", Pricing="1=1,22, 10=1,22, 50=1,22, 100=1,22, 1000=0,663, 10000=0,663 (USD)", RoHS=No, RoHS Compliant=No, Series=LPS4018, Shielding=Shielded, Stock=5229, Supplier=Mouser, Termination=SMD/SMT, Weight=0.003527oz, Width=4mm
I2: "0402 2.7nH ±0.3nH DCR=120mΩ Q=8@100MHz 800mA SRF=6GHz LQG15HS2N7S02D", Case Code (Imperial)=0402, Case Code (Metric)=1005, Current Rating=300mA, DC Resistance (DCR)=150mR, Manufacturer=Murata, Manufacturer Part Number=LQG15HS2N7S02D, Max Operating Temperature=125°C, Min Operating Temperature=-55°C, Package Quantity=1, Self Resonant Frequency=6GHz, Supplier Part Number=81-LQG15HS2N7S02D, Test Frequency=100MHz, Case/Package=0402, Category="Fixed Inductors", ComponentLink1Description=https://datasheet.ciiva.com/11801/0900766b8090d685-11801391.pdf?src-supplier=Rs, ComponentLink1URL=https://datasheet.ciiva.com/11801/0900766b8090d685-11801391.pdf?src-supplier=Rs, ComponentLink2Description=https://datasheet.ciiva.com/1038/l0075s0083lqg15hs-1038152.pdf?src-supplier=Digikey, ComponentLink2URL=https://datasheet.ciiva.com/1038/l0075s0083lqg15hs-1038152.pdf?src-supplier=Digikey, ComponentLink3Description=https://datasheet.ciiva.com/1038/l0075s0083lqg15hs-1038151.pdf?src-supplier=Digikey, ComponentLink3URL=https://datasheet.ciiva.com/1038/l0075s0083lqg15hs-1038151.pdf?src-supplier=Digikey, ComponentLink4Description=https://datasheet.ciiva.com/1038/l0075s0083lqg15hs-1038153.pdf?src-supplier=Digikey, ComponentLink4URL=https://datasheet.ciiva.com/1038/l0075s0083lqg15hs-1038153.pdf?src-supplier=Digikey, ComponentLink5Description=https://datasheet.ciiva.com/8510/l0075s0083lqg15hs-8510853.pdf?src-supplier=Avnet, ComponentLink5URL=https://datasheet.ciiva.com/8510/l0075s0083lqg15hs-8510853.pdf?src-supplier=Avnet, Core Material=Air, DC Current=300mA, Depth=0.55mm, Height=0.5mm, Height - Seated (Max)=0.022inch, Lead Free="Lead Free", Length=1mm, Max Current Rating=300mA, Max DC Current=300mA, Military Standard=Not, Mounting Technology="Surface Mount", Packaging="Tape and Reel", Pricing="1=0,1, 10=0,036, 50=0,036, 100=0,028, 1000=0,022, 10000=0,019 (USD)", Q Factor=8, Radiation Hardening=No, RoHS=Yes, RoHS Compliant=Yes, Series=LQG15HS, Shielding=Unshielded, Stock=39556, Supplier=Mouser, Termination=SMD/SMT, Width=0.02inch
I3: "Ind Chip Wirewound 8.3nH 0.2nH 0402 Paper T/R LQW15AN8N3C1ZD", Manufacturer=Murata, Manufacturer Part Number=LQW15AN8N3C1ZD, Supplier Part Number=81-LQW15AN8N3C1ZD, Category="Fixed Inductors", Pricing="1=0,22, 10=0,179, 50=0,179, 100=0,128, 1000=0,088, 10000=0,073 (USD)", RoHS=Yes, Stock=672, Supplier=Mouser
I4 I5: "Ind Chip Wirewound 9.7nH 5% 0402 Paper T/R LQW15AN9N7J0ZD", Manufacturer=Murata, Manufacturer Part Number=LQW15AN9N7J0ZD, Supplier Part Number=81-LQW15AN9N7J0ZD, Category="Fixed Inductors", ComponentLink1Description=https://datasheet.octopart.com/LQW15AN9N7J0ZD-Murata-datasheet-142542139.pdf?src-supplier=Ciiva+Crawler, ComponentLink1URL=https://datasheet.octopart.com/LQW15AN9N7J0ZD-Murata-datasheet-142542139.pdf?src-supplier=Ciiva+Crawler, ComponentLink2Description=https://datasheet.octopart.com/LQW15AN9N7J0ZD-Murata-datasheet-140717477.pdf?src-supplier=Ciiva+Crawler, ComponentLink2URL=https://datasheet.octopart.com/LQW15AN9N7J0ZD-Murata-datasheet-140717477.pdf?src-supplier=Ciiva+Crawler, ComponentLink3Description=https://datasheet.octopart.com/LQW15AN9N7J0ZD-Murata-datasheet-140716931.pdf?src-supplier=Ciiva+Crawler, ComponentLink3URL=https://datasheet.octopart.com/LQW15AN9N7J0ZD-Murata-datasheet-140716931.pdf?src-supplier=Ciiva+Crawler, ComponentLink4Description=https://datasheet.octopart.com/LQW15AN9N7J0ZD-Murata-datasheet-138758516.pdf?src-supplier=Ciiva+Crawler, ComponentLink4URL=https://datasheet.octopart.com/LQW15AN9N7J0ZD-Murata-datasheet-138758516.pdf?src-supplier=Ciiva+Crawler, ComponentLink5Description=https://datasheet.octopart.com/LQW15AN9N7J0ZD-Murata-datasheet-145451983.pdf?src-supplier=Geoflip, ComponentLink5URL=https://datasheet.octopart.com/LQW15AN9N7J0ZD-Murata-datasheet-145451983.pdf?src-supplier=Geoflip, Pricing="1=0,18, 10=0,148, 50=0,148, 100=0,106, 1000=0,073, 10000=0,061 (USD)", Stock=7774, Supplier=Mouser
I6 I7: "Inductor RF Chip Unshielded Multi-Layer 0.01uH 5% 100MHz 23Q-Factor 0.5A 0.19Ohm DCR 0402 Automotive T/R LQG15WZ10NJ02D", Case Code (Imperial)=0402, Case Code (Metric)=1005, Current Rating=500mA, DC Resistance (DCR)=190mR, Manufacturer=Murata, Manufacturer Part Number=LQG15WZ10NJ02D, Max Operating Temperature=125°C, Min Operating Temperature=-55°C, Ratings=AEC-Q200, Self Resonant Frequency=3.3GHz, Supplier Part Number=490-15244-1-ND, Test Frequency=100MHz, Tolerance=5%, Case/Package=0402, Category="Fixed Inductors", ComponentLink1Description=https://datasheet.octopart.com/LQG15WZ10NJ02D-Murata-datasheet-140317171.pdf?src-supplier=Element14, ComponentLink1URL=https://datasheet.octopart.com/LQG15WZ10NJ02D-Murata-datasheet-140317171.pdf?src-supplier=Element14, ComponentLink2Description=http://search.murata.co.jp/Ceramy/image/img/P02/JELF243B-9117.pdf?src-supplier=Digi-Key, ComponentLink2URL=http://search.murata.co.jp/Ceramy/image/img/P02/JELF243B-9117.pdf?src-supplier=Digi-Key, ComponentLink3Description=https://search.murata.co.jp/Ceramy/image/img/P02/JELF243B-9117.pdf?src-supplier=Digi-Key, ComponentLink3URL=https://search.murata.co.jp/Ceramy/image/img/P02/JELF243B-9117.pdf?src-supplier=Digi-Key, ComponentLink4Description=https://datasheet.octopart.com/LQG15WZ10NJ02D-Murata-datasheet-166148638.pdf?src-supplier=TME, ComponentLink4URL=https://datasheet.octopart.com/LQG15WZ10NJ02D-Murata-datasheet-166148638.pdf?src-supplier=TME, Core Material=Air, Mounting Technology="Surface Mount", Packaging="Cut Tape", Pricing="1=0,12, 10=0,099, 25=0,0912, 50=0,0804, 100=0,0703, 250=0,06696, 500=0,06294, 1000=0,0482, 2500=0,04553 (USD)", RoHS=Yes, RoHS Compliant=Yes, Series=LQG15, Shielding=Unshielded, Stock=34631, Supplier=Digi-Key
J1: "1.25mm Pitch PicoBlade™ Header, Surface Mount, Right Angle, Lead-Free, 2 Circuits", Color=Beige, Contact Resistance=20mR, Current Rating=1A, Flammability Rating="UL94 V-0", Housing Color=Natural, Insulation Resistance=100MR, Manufacturer=Molex, Manufacturer Part Number=53261-0271, Max Operating Temperature=85°C, Min Operating Temperature=-40°C, Package Quantity=1000, Supplier Part Number=538-53261-0271, Voltage Rating=125V, Category="Headers and Wire Housings", Connector Type=Header, Contact Finish - Mating=TIN, Contact Material=Bronze,Tin, Contact Plating=Tin, Contact Shape=Rectangular, Contact Type="Blade Pin", Depth=5.2mm, Fastening Type=Detent, Gender=Male, Glow Wire Compliant=Non-compliant, Housing Material=Nylon, Insulation Color=Natural, Insulation Material=Nylon, Lead Free="Lead Free", Lead Pitch=1.25mm, Mounting Technology="Surface Mount", Number of Circuits=2, Number of Contacts=2, Number of Positions=2, Number of Rows=1, Orientation="Right Angle", Packaging="Tape and Reel", Pitch=1.25mm, Plating=154ConductorMaterial, Pricing="1=0,48, 10=0,41, 50=0,41, 100=0,346, 1000=0,262, 10000=0,239 (USD)", Radiation Hardening=No, Reach SVHC Compliant=Unknown, RoHS=Yes, RoHS Compliant=Yes, Series=PicoBlade, Stock=24818, Supplier=Mouser, Termination=Solder, Voltage Rating (AC)=125V, Voltage Rating (DC)=125V, Working Voltage=125V
J2: library part "J TAG for STM TC-2030"
R1 R2: "SMD Chip Resistor, 150 Ohm, ± 1%, 62.5 mW, 0402 [1005 Metric], Thick Film, General Purpose", Case Code (Imperial)=0402, Case Code (Metric)=1005, JLCPCB=C138054, Manufacturer=Yageo, Manufacturer Part Number=RC0402FR-07150RL, Max Operating Temperature=155°C, Max Power Dissipation=63mW, Min Operating Temperature=-55°C, Package Quantity=1, Power Rating=62.5mW, Resistance=150R, Resistance Tolerance=1%, Resistor Type="Thick Film", Supplier Part Number=1987667, Temperature Coefficient=100ppm/°C, Voltage Rating=50V, Case/Package=0402, Category="Chip SMD Resistors", ComponentLink1Description=https://datasheet.ciiva.com/11808/0900766b80c66297-11808422.pdf?src-supplier=RSComponents, ComponentLink1URL=https://datasheet.ciiva.com/11808/0900766b80c66297-11808422.pdf?src-supplier=RSComponents, ComponentLink2Description=https://datasheet.ciiva.com/7983/1018594-7983495.pdf?src-supplier=Element14, ComponentLink2URL=https://datasheet.ciiva.com/7983/1018594-7983495.pdf?src-supplier=Element14, ComponentLink3Description=https://datasheet.ciiva.com/2453/pyu-r-int-thick-7-2453374.pdf?src-supplier=Digi-Key, ComponentLink3URL=https://datasheet.ciiva.com/2453/pyu-r-int-thick-7-2453374.pdf?src-supplier=Digi-Key, ComponentLink4Description=https://datasheet.ciiva.com/2453/pyu-r-int-thick-7-2453375.pdf?src-supplier=Digi-Key, ComponentLink4URL=https://datasheet.ciiva.com/2453/pyu-r-int-thick-7-2453375.pdf?src-supplier=Digi-Key, ComponentLink5Description=https://datasheet.ciiva.com/2453/pyu-r-int-thick-7-2453373.pdf?src-supplier=Digi-Key, ComponentLink5URL=https://datasheet.ciiva.com/2453/pyu-r-int-thick-7-2453373.pdf?src-supplier=Digi-Key, ComponentLink6Description=https://datasheet.ciiva.com/5558/pyu-rc0402-51-rohs-l-6-r-5558110.pdf?src-supplier=Mouser, ComponentLink6URL=https://datasheet.ciiva.com/5558/pyu-rc0402-51-rohs-l-6-r-5558110.pdf?src-supplier=Mouser, ComponentLink7Description=https://datasheet.ciiva.com/7849/1018594-7849838.pdf?src-supplier=Element14, ComponentLink7URL=https://datasheet.ciiva.com/7849/1018594-7849838.pdf?src-supplier=Element14, ComponentLink8Description=https://datasheet.ciiva.com/7849/1018594-7849839.pdf?src-supplier=Element14, ComponentLink8URL=https://datasheet.ciiva.com/7849/1018594-7849839.pdf?src-supplier=Element14, ComponentLink9Description=https://datasheet.ciiva.com/16740/pyu-rc0402-51-rohs-l-6-r-16740923.pdf?src-supplier=Future+Electronics, ComponentLink9URL=https://datasheet.ciiva.com/16740/pyu-rc0402-51-rohs-l-6-r-16740923.pdf?src-supplier=Future+Electronics, ComponentLink10Description=https://datasheet.ciiva.com/15189/getdatasheetpartid-330680-15189357.pdf?src-supplier=Verical, ComponentLink10URL=https://datasheet.ciiva.com/15189/getdatasheetpartid-330680-15189357.pdf?src-supplier=Verical, Construction=Rectangular, Depth=0.5mm, Features="Moisture Resistant", Height=0.016inch, Lead Free="Lead Free", Length=1mm, Military Standard=Not, Number of Terminations=2, Packaging="Tape and Reel", Pricing="100=0,005, 1000=0,004, 2500=0,004, 5000=0,004, 10000=0,004 (EUR)", Pricing 1="10000=0,00140 (USD)", Pricing 2="10000=0,00200, 50000=0,00200, 100000=0,00200, 200000=0,00200, 400000=0,00200 (GBP)", Pricing 3="1=0,10000, 10=0,01500, 100=0,00610, 1000=0,00275, 2500=0,00239, 5000=0,00197 (USD)", REACH SVHC="No SVHC", Reach SVHC Compliant=Unknown, RoHS=Yes, RoHS Compliant=Yes, Series=RC, Stock=19700, Stock 1=70000, Stock 2=10800, Stock 3=2629290, Supplier=Rs, Supplier 1="Arrow Electronics", Supplier 2=RSComponents, Supplier 3=Digi-Key, Supplier Part Number 1=RC0402FR-07150RL, Supplier Part Number 2=1987666, Supplier Part Number 3=311-150LRCT-ND, Technology="THICK FILM", Termination=SMD/SMT, Tolerance=1%, Width=0.02inch, Working Voltage=50V
R3 R4 R5: "SMD Chip Resistor, 5.1 kOhm, ± 1%, 63 mW, 0402 [1005 Metric], Thick Film, General Purpose CRCW04025K10FKED", Case Code (Imperial)=0402, Case Code (Metric)=1005, Manufacturer=Vishay, Manufacturer Part Number=CRCW04025K10FKED, Max Operating Temperature=155°C, Max Power Dissipation=63mW, Min Operating Temperature=-55°C, Package Quantity=10000, Ratings=AEC-Q200, Resistance Tolerance=1%, Resistor Type="Thick Film", Supplier Part Number=71-CRCW0402-5.1K-E3, Temperature Coefficient=100ppm/°C, Voltage Rating=50V, Case/Package=0402, Category="Chip SMD Resistors", ComponentLink1Description=https://datasheet.ciiva.com/11809/0900766b80d98824-11809770.pdf?src-supplier=Rs, ComponentLink1URL=https://datasheet.ciiva.com/11809/0900766b80d98824-11809770.pdf?src-supplier=Rs, ComponentLink2Description=https://datasheet.ciiva.com/22675/1847332-22675086.pdf?src-supplier=Element14, ComponentLink2URL=https://datasheet.ciiva.com/22675/1847332-22675086.pdf?src-supplier=Element14, ComponentLink3Description=https://datasheet.ciiva.com/3256/dcrcwe3-3256680.pdf?src-supplier=Avnet, ComponentLink3URL=https://datasheet.ciiva.com/3256/dcrcwe3-3256680.pdf?src-supplier=Avnet, ComponentLink4Description=https://datasheet.ciiva.com/7690/1697337-7690682.pdf?src-supplier=Element14, ComponentLink4URL=https://datasheet.ciiva.com/7690/1697337-7690682.pdf?src-supplier=Element14, ComponentLink5Description=https://datasheet.ciiva.com/7172/1635184-7172981.pdf?src-supplier=Newark, ComponentLink5URL=https://datasheet.ciiva.com/7172/1635184-7172981.pdf?src-supplier=Newark, ComponentLink6Description=https://datasheet.ciiva.com/2464/dcrcwe3-2464034.pdf?src-supplier=Digikey, ComponentLink6URL=https://datasheet.ciiva.com/2464/dcrcwe3-2464034.pdf?src-supplier=Digikey, ComponentLink7Description=https://datasheet.ciiva.com/2464/dcrcwe3-2464035.pdf?src-supplier=Digikey, ComponentLink7URL=https://datasheet.ciiva.com/2464/dcrcwe3-2464035.pdf?src-supplier=Digikey, ComponentLink8Description=https://datasheet.ciiva.com/7690/1697337-7690683.pdf?src-supplier=Element14, ComponentLink8URL=https://datasheet.ciiva.com/7690/1697337-7690683.pdf?src-supplier=Element14, ComponentLink9Description=https://datasheet.ciiva.com/2464/dcrcwe3-2464033.pdf?src-supplier=Digikey, ComponentLink9URL=https://datasheet.ciiva.com/2464/dcrcwe3-2464033.pdf?src-supplier=Digikey, Construction=Rectangular, Contact Plating=Tin, Depth=0.5mm, Features="Automotive AEC-Q200", Height=0.35mm, Lead Free=5697LeadFree, Length=1mm, Military Standard=Not, Number of Terminations=2, Packaging="Tape and Reel", Power Rating=63mW, Pricing="1=0,1, 10=0,017, 50=0,017, 100=0,01, 1000=0,007, 10000=0,003 (USD)", Radiation Hardening=No, Reach SVHC Compliant=Unknown, RoHS=Yes, RoHS Compliant=Yes, Series=CRCW, Stock=412876, Supplier=Mouser, Technology="THICK FILM", Termination=SMD/SMT, Tolerance=1%, Voltage Rating (DC)=50V, Weight=2.3E-05oz, Width=0.5mm